# Altium PCB DebugBreakout_RevC.PcbDoc
Units mil, origin at the board's own origin, x right, y up, seen from the top; angles counter-clockwise.
Board outline 1574.8 x 1377.95 mil, 2 copper layers (Top Layer, Bottom Layer), stack 61.8 mil thick; 7 components, 14 nets, 49 pads, 96 vias.
Unrouted connection lines stored in the file: 55.
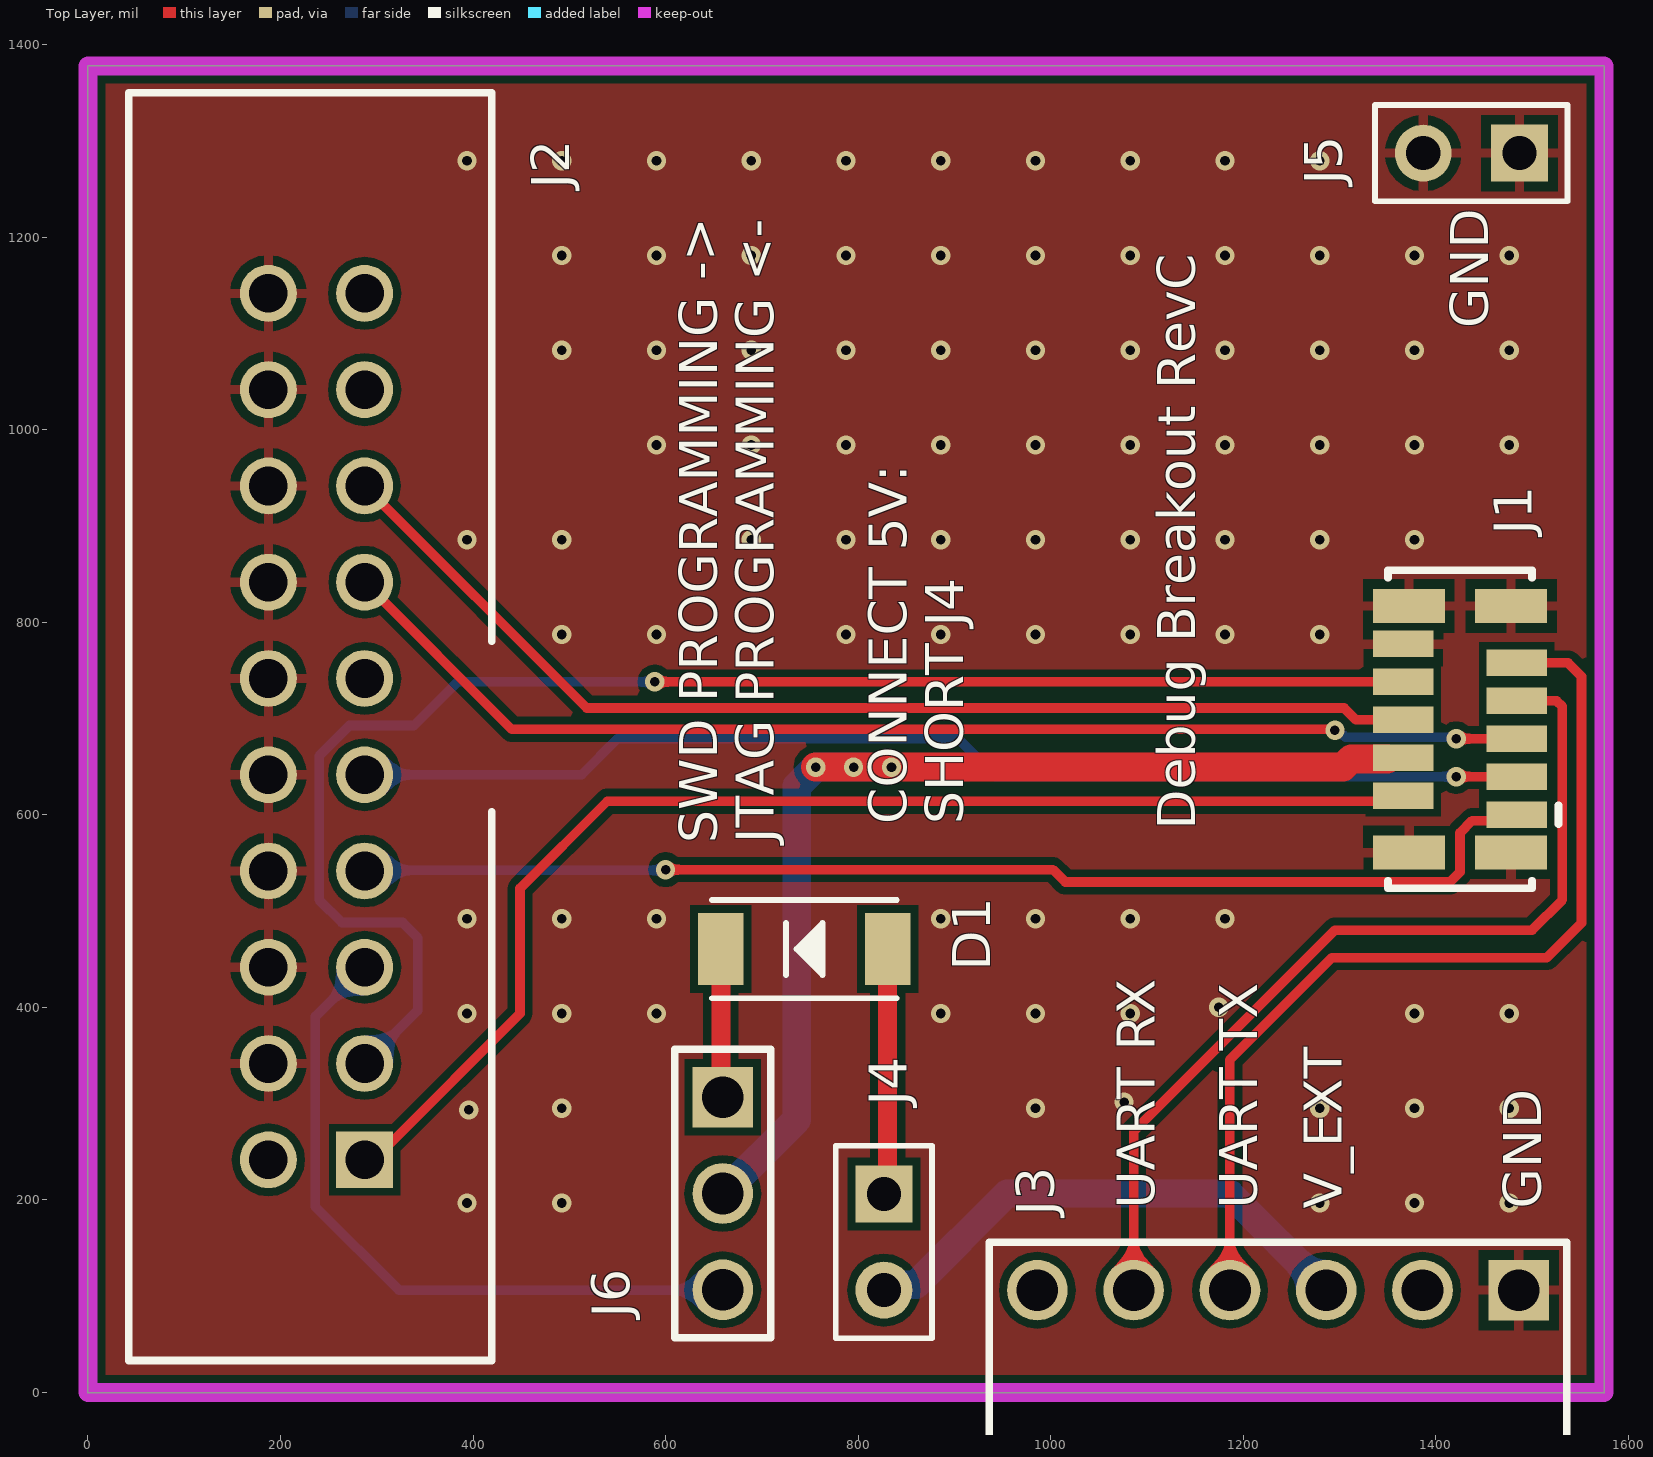
[diagram p0: Top Layer view]
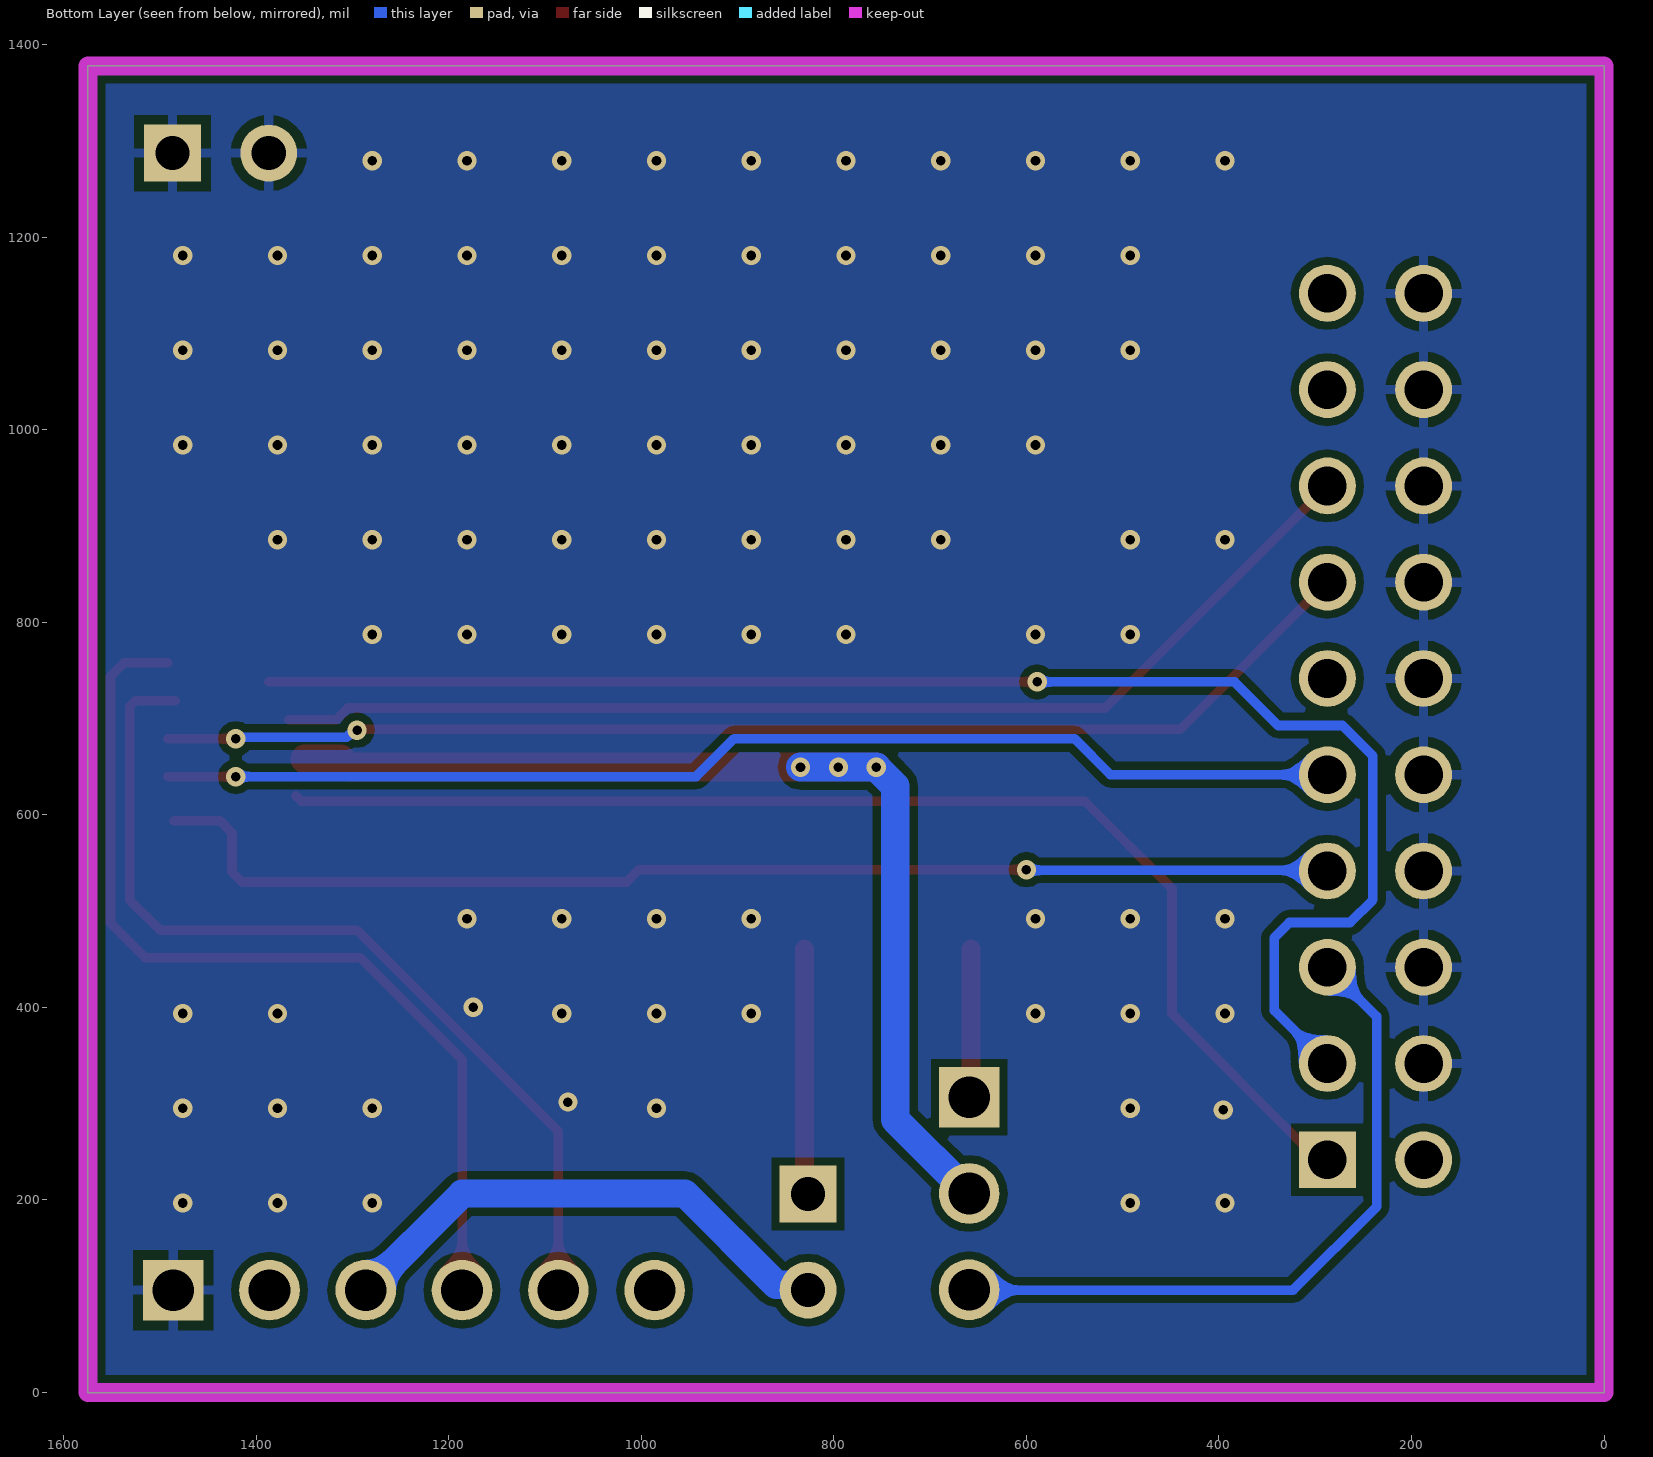
[diagram p1: Bottom Layer view, seen from below]
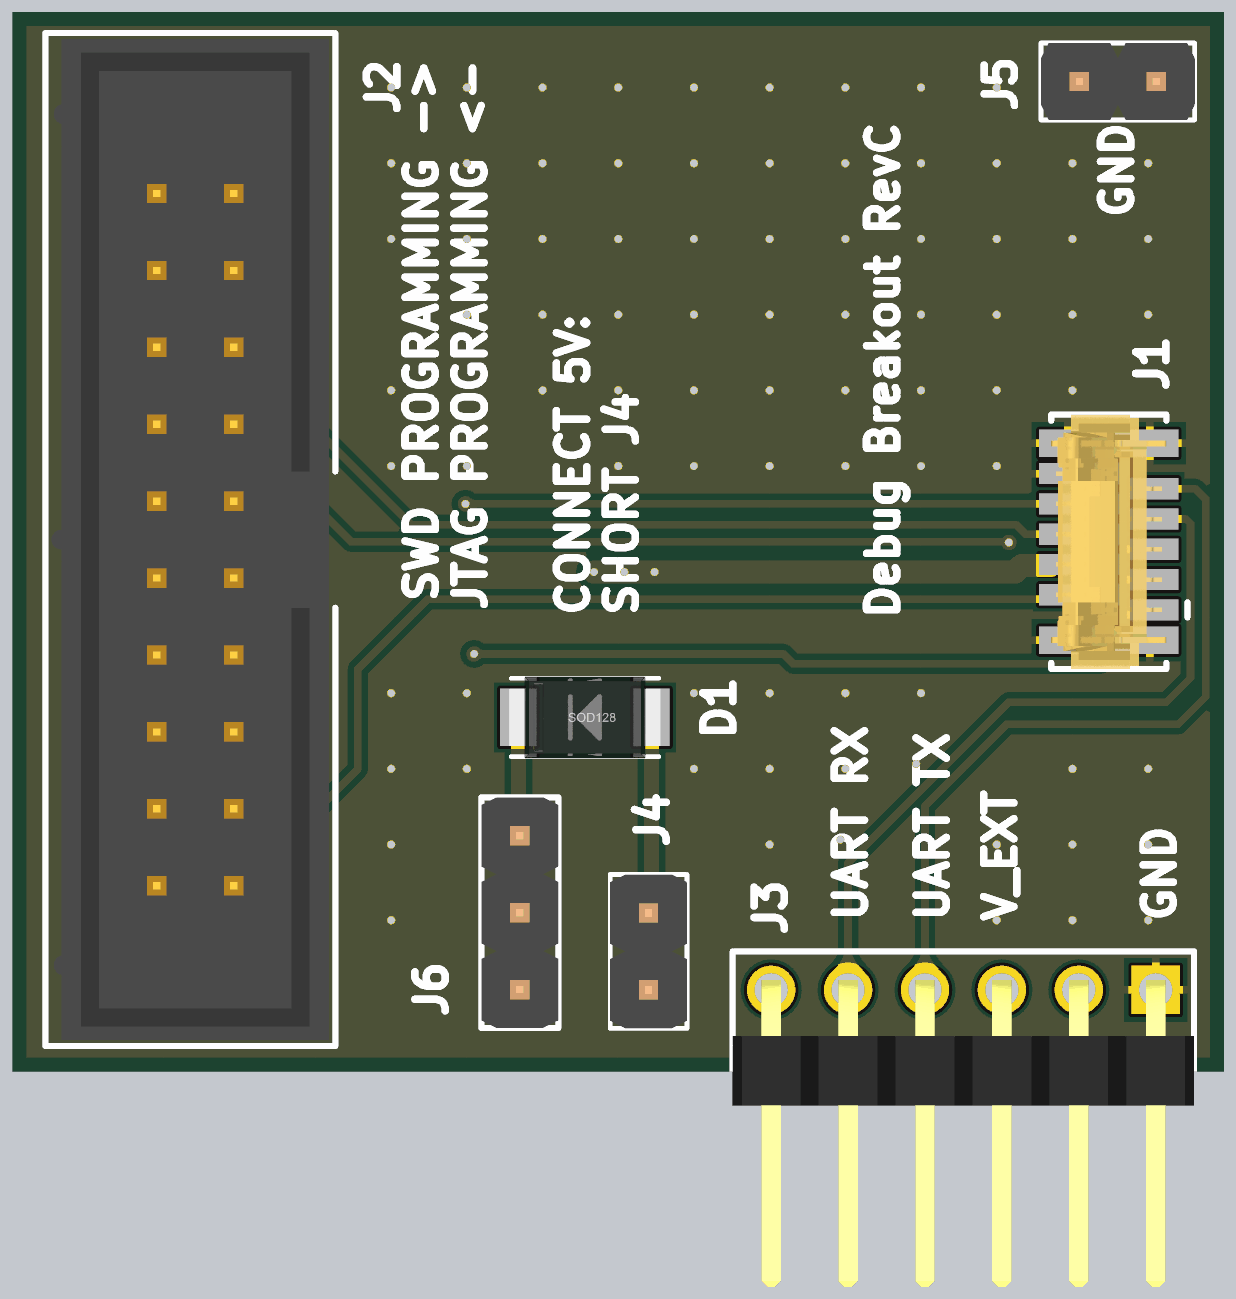
[diagram p2: 3D render of the assembled board from above, using the file's embedded part models]

## Layer stack, top to bottom
Top Solder: solder mask 0.6, Solder Resist, Dk 3.5
Top Layer: signal copper 1.4
core: core 59, Dk 4.2
Bottom Layer: signal copper 1.4
Bottom Solder: solder mask 0.6, Solder Resist, Dk 3.5

## Board outline
0,0 0,1377.95 1574.8,1377.95 1574.8,0

## Design rules (kind name [scope] priority, off if disabled: settings)
Clearance [All] p1: gap=8.03 ignorepadtopadclearanceinfootprint=TRUE
DiffPairsRouting [All] p1: maxlimit=10 minlimit=2.5 mostfreqgap=5 toplayer_minwidth=7 toplayer_maxwidth=18 toplayer_prefwidth=18 bottomlayer_minwidth=7 bottomlayer_maxwidth=18 bottomlayer_prefwidth=18 impedanceprofiledriven=TRUE impedanceprofileid={3BFDFDED-0C9E-4B3D-B191-4005079E9189} maxuncoupledlength=500
HoleSize [All] p1: absolutevalues=TRUE maxlimit=196.85 minlimit=6.02 maxpercent=80.000 minpercent=20.000
MinimumSolderMaskSliver [All] p1: minsoldermaskwidth=3
PlaneConnect [All] p1: pad.planeconnectstyle=Relief pad.reliefexpansion=20 pad.reliefentries=4 pad.reliefconductorwidth=10 pad.reliefairgap=10 via.planeconnectstyle=Direct via.reliefexpansion=20 via.reliefentries=4 via.reliefconductorwidth=10 via.reliefairgap=10
PolygonConnect [All] p1: thpad.connectstyle=Relief thpad.reliefconductorwidth=10 thpad.reliefentries=4 thpad.polygonreliefangle="90 Angle" thpad.airgapwidth=10 smdpad.connectstyle=Relief smdpad.reliefconductorwidth=10 smdpad.reliefentries=4 smdpad.polygonreliefangle="90 Angle" smdpad.airgapwidth=10 via.connectstyle=Direct via.reliefconductorwidth=10 via.reliefentries=4 via.polygonreliefangle="90 Angle" via.airgapwidth=10
RoutingVias [All] p1: holewidth=12.01 width=24.02 viastyle="Through Hole" minholewidth=10 minwidth=20 maxholewidth=19.68 maxwidth=50
SolderMaskExpansion [All] p1: expansion=4 istentingtop=FALSE
Width [All] p1: maxlimit=1000 minlimit=8.03 preferedwidth=10 minimp=50.000000 maximp=50.000000 favimp=50.000000
26 further rules are at their usual default settings.

## Components (designator, comment, footprint, x,y, rotation, side; value= is the part's Value field where it differs from the comment)
D1 "PMEG3010EP,115" DIODE-SOD128 744.09,460.63 r180 top
J1 "FH12-10S-0.5SVA(54)" "CONN-V-FPC-10P FH12-10S-0.5SVA(54)" 1425.2,688.98 r270 top
J2 "SBH11-PBPC-D10-ST-BK" HDR-V-2x10-KEYED 237.4,691.73 r270 top
J3 "TSW-106-09-T-S-RA" HDR-RA-1X6 1236.22,106.3 r180 top
J4 "61300211121" HDR-V-1X2 826.77,156.3 r270 top
J5 "61300211121" HDR-V-1X2 1437.01,1287.4 r180 top
J6 "61300311121" HDR-V-1X3 659.45,206.69 r270 top

## Footprints (in the part's own frame and the unit in brackets; to place one, negate y for a bottom-side part, rotate by r counter-clockwise, add the part's x,y. Pads: shape width x height; smd on the part's side, far side on the other; paste and mask are expansions set on the pad)
"CONN-V-FPC-10P FH12-10S-0.5SVA(54)" [mm] "10 POS 0.5 MM PITCH FPC VERT"
  rect 0.7x1.6 smd: 1(2.25,1.5) 2(1.75,-1.5) 3(1.25,1.5) 4(0.75,-1.5) 5(0.25,1.5) 6(-0.25,-1.5) 7(-0.75,1.5) 8(-1.25,-1.5) 9(-1.75,1.5) 10(-2.25,-1.5)
  rect 0.9x1.9 smd: ME1(3.25,1.35) ME2(3.25,-1.35) ME3(-3.25,1.35) ME4(-3.25,-1.35)
  silkscreen extent -4.2,-1.9 4.2,2.6, body extent -4.2,-1.9 4.2,1.9, height 5.5
DIODE-SOD128 [mm]
  rect 1.2x1.9 smd: 1(2.2,0) 2(-2.2,0)
  silkscreen extent -2.44,-1.3 2.44,1.3, body extent -2.5,-1.35 2.5,1.35, height 1.1
HDR-RA-1X6 [mm]
  rect 1.6x1.6 hole 1.1: 1(-6.35,0)
  round 1.6 hole 1.1: 2(-3.81,0) 3(-1.27,0) 4(1.27,0) 5(3.81,0) 6(6.35,0)
  silkscreen extent -7.62,-1.27 7.62,4.33, body extent -7.62,-0.32 7.62,9.81, height 2.51
HDR-V-1X2 [mm]
  rect 1.5x1.5 hole 0.9: 1(-1.27,0)
  round 1.5 hole 0.9: 2(1.27,0)
  silkscreen extent -2.54,-1.27 2.54,1.27, body extent -2.54,-1.27 2.54,1.27, height 8.55
HDR-V-1X3 [mm]
  rect 1.6x1.6 hole 1.1: 1(-2.54,0)
  round 1.6 hole 1.1: 2(0,0) 3(2.54,0)
  silkscreen extent -3.81,-1.27 3.81,1.27, body extent -3.81,-1.27 3.81,1.27, height 8.55
HDR-V-2x10-KEYED [mm]
  rect 1.5x1.5 hole 1.02: 1(11.43,1.27)
  round 1.5 hole 1.02: 2(11.43,-1.27) 3(8.89,1.27) 4(8.89,-1.27) 5(6.35,1.27) 6(6.35,-1.27) 7(3.81,1.27) 8(3.81,-1.27) 9(1.27,1.27) 10(1.27,-1.27) 11(-1.27,1.27) 12(-1.27,-1.27) 13(-3.81,1.27) 14(-3.81,-1.27) 15(-6.35,1.27) 16(-6.35,-1.27) 17(-8.89,1.27) 18(-8.89,-1.27) 19(-11.43,1.27) 20(-11.43,-1.27)
  silkscreen extent -16.73,-4.95 16.73,4.62, body extent -16.53,-4.75 16.53,4.42, height 9

## Part data
D1: library part DIODE-SCHOTTKY-30V-1A-SOD128, "DIODE SCHOTTKY 30V 1A SOD128", Base Part Number=PMEG3010, Capacitance @ Vr, F="170pF @ 1V, 1MHz", Current - Average Rectified (Io)=1A, Manufacturer 1="Nexperia USA Inc.", Operating Temperature - Junction="150°C (Max)", Package / Case=SOD-128, Reverse Voltage=30V, Supplier Device Package=CFP5, Supplier Part Number 1=1727-5408-1-ND, Category="Discrete Semiconductor Products", ComponentLink1Description=https://assets.nexperia.com/documents/data-sheet/PMEG3010EP.pdf, ComponentLink1URL=https://assets.nexperia.com/documents/data-sheet/PMEG3010EP.pdf, Diode Type=Schottky, Manufacturer Part Number 1=PMEG3010EP,115, Mounting Type="Surface Mount", Packaging="Tape & Reel (TR)", Part Status=Active, Pricing 1="3000=0.11556, 6000=0.10856, 15000=0.10155, 30000=0.09338 (USD)", RoHS="RoHS Compliant", Speed="Fast Recovery =< 500ns, > 200mA (Io)", Stock 1=0, Supplier 1=Digi-Key
J1: library part CONN-V-FPC-10P-0.5MM, "CONN FFC VERT 10POS 0.50MM SMD", Contact Resistance=50mR, Current Rating=500mA, Flammability Rating="UL94 V-0", Insulation Resistance=500MR, Manufacturer 1=Hirose, Max Operating Temperature=85°C, Min Operating Temperature=-40°C, Package Quantity=1000, Supplier Part Number 1=H125134CT-ND, Voltage Rating=50V, Actuator Material=Polyphenylene, ComponentLink1Description=https://datasheet.ciiva.com/18554/fh12-18554796.pdf?src-supplier=Digi-Key, ComponentLink1URL=https://datasheet.ciiva.com/18554/fh12-18554796.pdf?src-supplier=Digi-Key, ComponentLink2Description=https://datasheet.ciiva.com/13702/ed-fh12-20140305-355586-13702565.pdf?src-supplier=Mouser, ComponentLink2URL=https://datasheet.ciiva.com/13702/ed-fh12-20140305-355586-13702565.pdf?src-supplier=Mouser, Contact Material=Bronze, Contact Plating=Gold, Gender=Receptacle, Housing Material=Nylon, Lead Free="Lead Free", Manufacturer Part Number 1=FH12-10S-0.5SVA(54), Material=Nylon, Mating Cycles=20, Mount="Surface Mount", Number of Positions=10, Number of Rows=1, Packaging="Tape and Reel", Pitch=0.02inch, Pricing 1="1=1.18000, 10=1.03800, 25=0.97680, 50=0.93620, 100=0.89540, 250=0.81400, 500=0.73260 (USD)", REACH SVHC=Unknown, RoHS=Yes, Stock 1=1442, Supplier 1=Digi-Key, Termination=Solder, Wire/Cable Type=Straight
J2: library part HDR-V-2x10-M, "CONN HEADER VERT 20POS 2.54MM", Color=Black, Manufacturer 1=Sullins, Package Quantity=1, Supplier Part Number 1=S9172-ND, ComponentLink1Description=https://datasheet.ciiva.com/730/sbh11-pbpc-dxx-st-xx-730919.pdf?src-supplier=Digi-Key, ComponentLink1URL=https://datasheet.ciiva.com/730/sbh11-pbpc-dxx-st-xx-730919.pdf?src-supplier=Digi-Key, Connector Type="Male Pin", Contact Plating=Gold, Lead Free="Lead Free", Manufacturer Part Number 1=SBH11-PBPC-D10-ST-BK, Mount="Through Hole", Number of Positions=20, Number of Rows=2, Packaging=Tray, Pitch=0.1inch, Pricing 1="1=0.54000, 10=0.51000, 100=0.39120, 500=0.34020, 1000=0.28067, 5000=0.24665, 10000=0.24570 (USD)", RoHS=Yes, Row Spacing=0.1inch, Stock 1=23438, Supplier 1=Digi-Key, Termination=Solder
J3: library part HDR-RA-1X6-M, "Conn Unshrouded Header HDR 6 POS 2.54mm Solder RA Thru-Hole Automotive Bulk", Color=Black, Manufacturer 1=Samtec, Max Current Rating=7.6A, Max Operating Temperature=105°C, Max Voltage Rating (AC)=450V, Min Operating Temperature=-55°C, Supplier Part Number 1=SAM15949-ND, Category="Headers and Wire Housings", ComponentLink1Description=https://datasheet.ciiva.com/48560/htsw-th-48560268.pdf?src-supplier=Avnet, ComponentLink1URL=https://datasheet.ciiva.com/48560/htsw-th-48560268.pdf?src-supplier=Avnet, ComponentLink2Description=https://datasheet.ciiva.com/739/tsw-xxx-xx-xxx-x-xx-xxx-mkt-739950.pdf?src-supplier=Digi-Key, ComponentLink2URL=https://datasheet.ciiva.com/739/tsw-xxx-xx-xxx-x-xx-xxx-mkt-739950.pdf?src-supplier=Digi-Key, Connector Type="Male Pin", Contact Material=Bronze, Contact Mating Length=0.23inch, Contact Plating=Tin, Depth=9.9mm, Gender=Male, Housing Color=Black, Housing Material=Polyester, Length=15.24mm, Manufacturer Part Number 1=TSW-106-09-T-S-RA, Mount="Through Hole", Number of Contacts=6, Number of Positions=6, Number of Rows=1, Orientation="Right Angle", Packaging=Bulk, Pitch=2.54mm, Pricing 1="1=0.46000, 10=0.43500, 100=0.33350, 500=0.29000, 1000=0.23925, 5000=0.21025, 10000=0.19575 (USD)", Radiation Hardening=No, REACH SVHC="No SVHC", RoHS=Yes, Stock 1=1097, Supplier 1=Digi-Key, Termination=Solder
J4 J5: library part HDR-V-1X2-M, "Header, 2-Pin, 0.1\"", Colour=Black, Current Rating=3A, Manufacturer="Wurth Electronics", Max Operating Temperature=125°C, Min Operating Temperature=-40°C, Supplier Part Number 1=732-5315-ND, Voltage Rating=250V, ComponentLink1Description=https://datasheet.ciiva.com/13619/6130xx11121-48870-13619345.pdf, ComponentLink1URL=https://datasheet.ciiva.com/13619/6130xx11121-48870-13619345.pdf, Connector Type="Male Pin", Contact Gender=Male, Contact Material="Copper,Copper Alloy", Contact Mating Length=0.236inch, Contact Plating=Gold, Gender=Male, Housing Material=PBT, LatestRevisionDate=17-Jul-2002, LatestRevisionNote="Re-released for DXP Platform.", Lead Free="Lead Free", Manufacturer 1="Wurth Electronics", Manufacturer Part Number 1=61300211121, Mount="Through Hole", MPN=61300211121, Number of Contacts=2, Number of Positions=2, Number of Rows=1, Packaging=Bulk, Pitch=0.1inch, Pricing 1="1=0.13, 10=0.106, 25=0.088, 50=0.074, 100=0.067, 1000=0.061 (USD)", Publisher="Altium Limited", REACH SVHC=Unknown, Stock 1=88010, Supplier 1=Digi-Key, Termination="Through Hole"
J6: library part HDR-V-1X3-M, "Header, 3-Pin, 0.1\"", Colour=Black, Manufacturer="Wurth Electronics", Supplier Part Number 1=732-5316-ND, ComponentLink1Description=http://www.farnell.com/cad/1737268.pdf, ComponentLink1URL=http://www.farnell.com/cad/1737268.pdf, ComponentLink2Description=http://katalog.we-online.de/em/datasheet/6130xx11121.pdf, ComponentLink2URL=http://katalog.we-online.de/em/datasheet/6130xx11121.pdf, Connector Type="Male Pin", Contact Material=Copper, Contact Mating Length=0.236inch, Contact Plating=Gold, Gender=Male, LatestRevisionDate=17-Jul-2002, LatestRevisionNote="Re-released for DXP Platform.", Lead Free="Lead Free", Manufacturer 1="Wurth Electronics", Manufacturer Part Number 1=61300311121, Mount="Through Hole", MPN=61300311121, Number of Contacts=3, Number of Positions=3, Number of Rows=1, Packaging=Bulk, Pitch=0.1inch, Pricing 1="1=0.13, 10=0.106, 25=0.088, 50=0.074, 100=0.067, 1000=0.061 (USD)", Publisher="Altium Limited", REACH SVHC=Unknown, Stock 1=41782, Supplier 1=Digi-Key, Termination=Solder

## Via types
v1: diameter 20, hole 10, Top Layer to Bottom Layer, tented both sides, 96 vias

## Nets (pads, with @x,y where several pads share a name; then routed paths per layer and width w, separated by ;. In a path a pad name is that pad's centre, name@x,y a point inside that pad or via, vN(x,y) a via of type N, cw(c..) or ccw(c..) an arc to the next point about the centre after c; other vN are vias at no path point)
3V3: J1.2 J2.1 | length 1304.4
  Top Layer w10: J2.1 301.93,256.26 311.38,256.26 448.82,393.7 448.82,523.62 539.37,614.17 1353.11,614.17 J1.2@1359.02,620.08
GND: J1.10 J1.ME1 J1.ME2 J1.ME3 J1.ME4 J2.4 J2.6 J2.8 J2.10 J2.12 J2.14 J2.16 J2.18 J2.20 J3.1 J5.1 J5.2
  other v1: 393.7,196.85 492.13,196.85 1279.53,196.85 1377.95,196.85 1476.38,196.85 395.4,293.57 492.13,295.28 984.25,295.28 1279.53,295.28 1377.95,295.28 1476.38,295.28 1076.26,301.69 393.7,393.7 492.13,393.7 590.55,393.7 885.83,393.7 984.25,393.7 1082.68,393.7 1377.95,393.7 1476.38,393.7 1174.69,400.12 393.7,492.13 492.13,492.13 590.55,492.13 885.83,492.13 984.25,492.13 1082.68,492.13 1181.1,492.13 492.13,787.4 590.55,787.4 787.4,787.4 885.83,787.4 984.25,787.4 1082.68,787.4 1181.1,787.4 1279.53,787.4 393.7,885.83 492.13,885.83 688.98,885.83 787.4,885.83 885.83,885.83 984.25,885.83 1082.68,885.83 1181.1,885.83 1279.53,885.83 1377.95,885.83 590.55,984.25 688.98,984.25 787.4,984.25 885.83,984.25 984.25,984.25 1082.68,984.25 1181.1,984.25 1279.53,984.25 1377.95,984.25 1476.38,984.25 492.13,1082.68 590.55,1082.68 688.98,1082.68 787.4,1082.68 885.83,1082.68 984.25,1082.68 1082.68,1082.68 1181.1,1082.68 1279.53,1082.68 1377.95,1082.68 1476.38,1082.68 492.13,1181.1 590.55,1181.1 688.98,1181.1 787.4,1181.1 885.83,1181.1 984.25,1181.1 1082.68,1181.1 1181.1,1181.1 1279.53,1181.1 1377.95,1181.1 1476.38,1181.1 393.7,1279.53 492.13,1279.53 590.55,1279.53 688.98,1279.53 787.4,1279.53 885.83,1279.53 984.25,1279.53 1082.68,1279.53 1181.1,1279.53 1279.53,1279.53
NetD1_1: D1.1 J6.1 | length 154.8
  Top Layer w19.68: D1.1 657.48,308.66 J6.1
NetJ1_4: J1.4 J6.2 | length 1158.9
  Top Layer w30: v1(755.91,649.61) 1303.6,649.61 1312.22,658.23 J1.4@1349.65,658.23
  Bottom Layer w30: J6.2 736.22,283.46 736.22,629.92 v1(755.91,649.61) v1(834.65,649.61)
  other v1: 795.28,649.61
NRST: J1.6 J2.15 | length 1179.4
  Top Layer w10: J2.15 518.1,711.03 1304.82,711.03 1317.03,698.82 J1.6
SWCLK/TCLK: J1.3 J2.9 | length 1236.5
  Top Layer w10: v1(1421.26,639.76) J1.3@1492.13,639.76
  Bottom Layer w10: J2.9 512.69,641.73 550.09,679.13 903.68,679.13 943.05,639.76 v1(1421.26,639.76)
SWDIO/TMS: J1.1 J2.7 | length 1254.3
  Top Layer w10: v1(600,543.11) 1002.36,543.11 1015.19,530.28 1414.85,530.28 1425.2,540.63 1425.2,581.42 1437.76,593.98 J1.1@1485.51,593.98
  Bottom Layer w10: J2.7 288.09,542.42 599.31,542.42 v1(600,543.11)
SWO/TDO: J1.5 J2.13 | length 1272.1
  Top Layer w10: J2.13 440.16,688.98 1294.3,688.98 v1(1295.28,688) ; v1(1421.26,679.13) J1.5 J1.5@1492.13,679.13
  Bottom Layer w10: v1(1295.28,688) 1297.98,688 1302.98,683 1303.94,683 1306.13,680.81 1419.59,680.81 v1(1421.26,679.13)
TDI: J2.5 J6.3 | length 729.3
  Bottom Layer w10: J2.5 236.22,390.55 236.22,192.91 322.83,106.3 659.06,106.3 J6.3
TRST: J1.8 J2.3 | length 1600.3
  Top Layer w10: v1(588.82,738.19) J1.8 J1.8@1386.85,738.19
  Bottom Layer w10: J2.3 342.52,396.85 342.52,472.44 326.77,488.19 263.78,488.19 240.16,511.81 240.16,661.42 271.65,692.91 338.58,692.91 383.86,738.19 v1(588.82,738.19)
UART_RX: J1.7 J3.5 | length 960.4
  Top Layer w10: J3.5 1086.22,271.26 1295.28,480.31 1500,480.31 1531.5,511.81 1531.5,712.65 1525.64,718.5 J1.7
UART_TX: J1.9 J3.4 | length 984.8
  Top Layer w10: J3.4 1186.22,345.76 1292.2,451.74 1515.52,451.74 1551.46,487.68 1551.46,743.81 1537.4,757.87 J1.9@1492.13,757.87
V_EXT: J3.3 J4.2 | length 542.6
  Bottom Layer w29.53: J4.2 832.42,111.95 859.98,111.95 954.72,206.69 1185.83,206.69 J3.3
VBUS_5V: D1.2 J4.1 | length 254.3
  Top Layer w19.68: J4.1@830.71,206.3 D1.2
pads on no net: J2.2 J2.11 J2.17 J2.19 J3.2 J3.6

## Polygon pours and split planes (outlines as drawn)
GND on Top Layer "GND_L01_P059" (solid, remove dead copper, pour order 59): 0,1377.95 1574.8,1377.95 1574.8,0 0,0
GND on Bottom Layer "GND_L02_P060" (solid, remove dead copper, pour order 60): 0,1377.95 1574.8,1377.95 1574.8,0 0,0

## Keep-outs
Keep-Out Layer:
  the board outline again, w19.68

## Other copper
Top Layer:
  region: 5273.62,-1834.65
  region: 5273.62,-1771.65

## Silkscreen, mask and mechanical layers (free items; w line width, h text height)
Top Overlay:
  text "GND" at 1454.32,1105.68 h39.37 r90
  text "CONNECT 5V: / SHORT J4" at 909.45,590.55 h39.37 r90
  text "Debug Breakout RevC" at 1150.11,584.8 h39.37 r90
  text "SWD PROGRAMMING -> / JTAG PROGRAMMING <-" at 712.6,570.79 h39.37 r90
  text "UART RX" at 1108.11,191.1 h39.37 r90
  text "UART TX" at 1214.41,191.1 h39.37 r90
  text "V_EXT" at 1302.34,191.1 h39.37 r90
  text "GND" at 1509.68,191.1 h39.37 r90
Top Solder:
  region: 5273.62,-1834.65
  region: 5273.62,-1771.65
Board Outline:
  the board outline again, w7.87